# Altium PCB ROBOT_MOTHERBOARD.PcbDoc (part 2 of 3)
Units mm, origin at the board's own origin, x right, y up, seen from the top; angles counter-clockwise.
Board outline 122.81 x 59.7 mm, 4 copper layers (SIG1, GND, PWR, SIG2), stack 0.603 mm thick; 150 components, 74 nets, 540 pads, 464 vias.
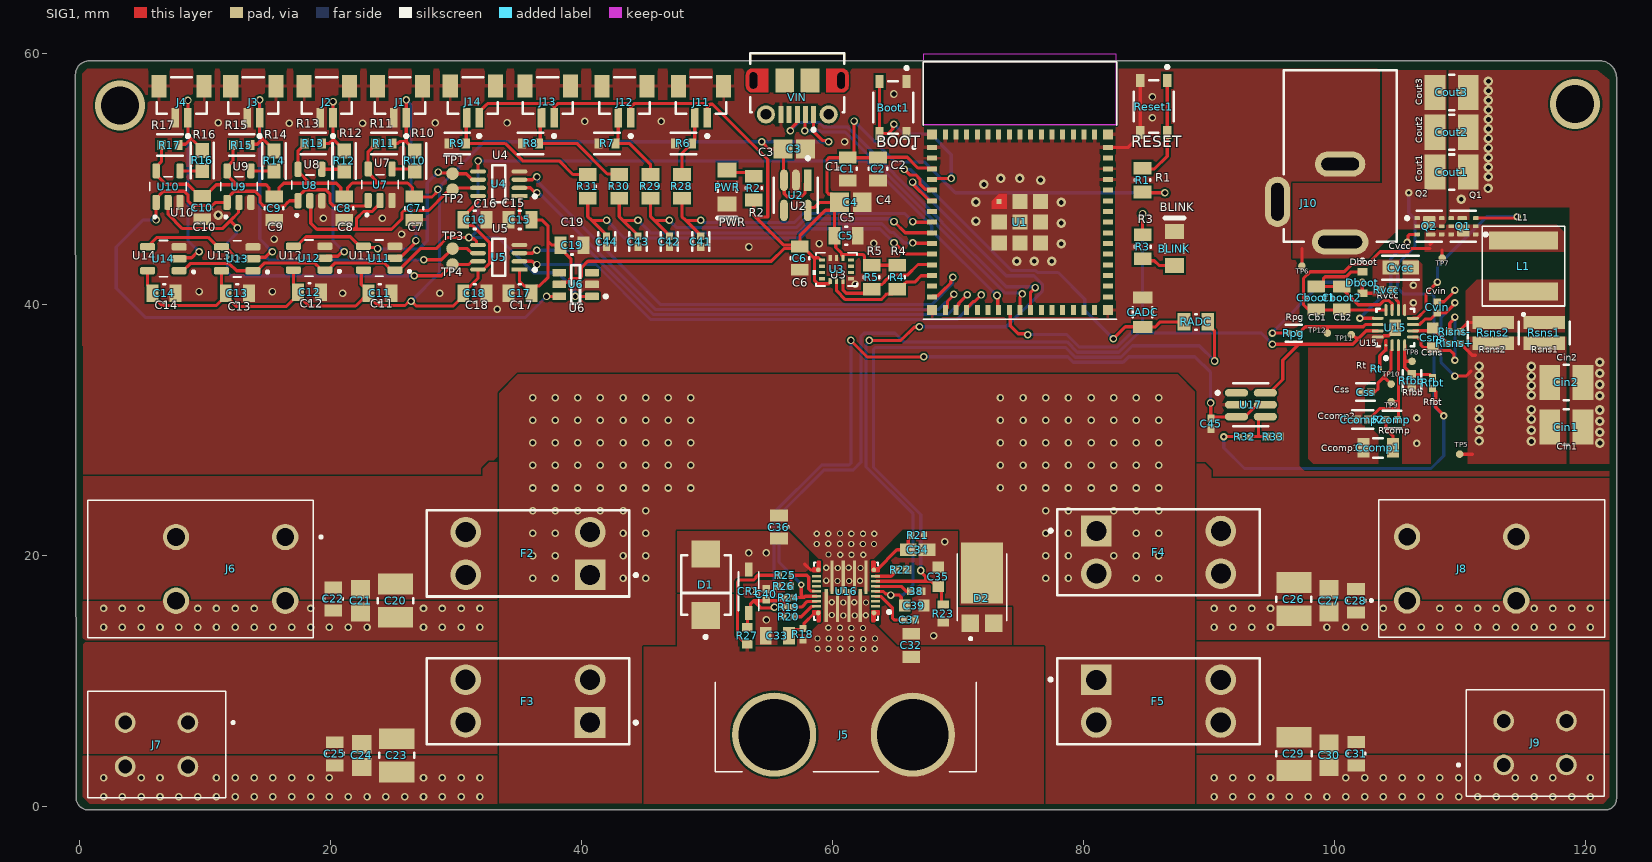
[diagram p0: SIG1 view]

## Part data (continued)
Rfbb: library part CMP-2002-08157-2, "RES Thick Film, 11kΩ, 1%, 0.063W, 100ppm/°C, 0402", Case Code (Imperial)=0402, Case Code (Metric)=1005, Max Operating Temperature=155°C, Max Power Dissipation=63mW, Min Operating Temperature=-55°C, Package Quantity=10, Resistance=11kR, Temperature Coefficient=100ppm/°C, Tolerance=1%, Voltage Rating=50V, Case/Package=0402, Composition="Thick Film", Contact Plating=Tin, Depth=0.5mm, Features="Automotive AEC-Q200", Height=0.35mm, Lead Free="Lead Free", Length=1mm, Military Standard=Not, Number of Pins=2, Number of Terminations=2, Packaging="Tape and Reel", Power Rating=63mW, Radiation Hardening=No, Termination=SMD/SMT, Voltage Rating (DC)=50V, Weight=2.3E-05oz, Width=0.02inch
Rfbt: library part CMP-2002-08212-1, Manufacturer="Vishay Dale", Part Number=CRCW0402150KFKED
Rsns1 Rsns2: library part CMP-2003-04764-2, "10 mOhms ±1% 1W Chip Resistor Wide 0612 (1632 Metric), Current Sense Thin Film", Case Code (Imperial)=1206, Case Code (Metric)=3216, Max Operating Temperature=125°C, Max Power Dissipation=1W, Min Operating Temperature=-55°C, Package Quantity=1000, Resistance=10mR, Resistor Type="Thin Film", Temperature Coefficient=200ppm/°C, Tolerance=1%, Case/Package=1206, Height=0.5mm, Lead Free="Lead Free", Length=3.2mm, Number of Terminations=2, Packaging="Cut Tape", Power Rating=1W, RoHS Compliant=Yes, Technology="THIN FILM", Termination=SMD/SMT, Weight=0.000466oz, Width=1.6mm
Rt: library part CMP-009-00177-1, "105 kOhms Â±1% 0.05W, 1/20W Chip Resistor 0201 (0603 Metric) Moisture Resistant Thick Film", Case/Package="SMD-2 Yageo", Check_prices=https://www.snapeda.com/parts/RC0201FR-07105KL/Yageo/view-part/?ref=eda, Component Type=Standard, Design Item ID=RC0201FR-07105KL, MF=Yageo, MP=RC0201FR-07105KL, Pins=2, SnapEDA_Link=https://www.snapeda.com/parts/RC0201FR-07105KL/Yageo/view-part/?ref=snap, Source=RC0201FR-07105KL.SchLib
Rvcc: library part CMP-2002-08486-1, Manufacturer="Vishay Dale", Part Number=CRCW04022R00FKED
U1: library part CMP-025-000000-2, Package=None, Component Type=Standard, Design Item ID=ESP32-S3-MINI-1-N8, MF="{'manufacturer': u'Espressif Systems'}", MP=ESP32-S3-MINI-1-N8, Pin Count=73, Price=None, Source=ESP32-S3-MINI-1-N8.SchLib
U2: library part CMP-12756-000035-1, "IC REG LINEAR 3.3V 600MA SOT25", Case/Package=SOT-23-5, Dropout Voltage=250mV, Max Input Voltage=6V, Max Operating Temperature=85°C, Max Output Current=600mA, Min Input Voltage=2.5V, Min Operating Temperature=-40°C, Output Voltage=3.3V, Package Quantity=1, Quiescent Current=55uA, Accuracy=1.5%, Height=1.3mm, Lead Free="Lead Free", Length=3.1mm, Mount="Surface Mount", Number of Outputs=1, Number of Pins=5, Number of Regulators=1, Output Current=600mA, Output Type=Fixed, Packaging="Tape and Reel", Polarity=Positive, Width=1.7mm
U3: "No Description Available", Manufacturer_Name="Bosch Sensortec", Copyright="Copyright (C) 2025 Ultra Librarian. All rights reserved.", Manufacturer_Part_Number=BMI323, RefDes=RefDes, Type=Type
U4 U5: library part CMP-0000-1, "2-Bit Dual Supply Transceiver with Configurable Voltage-Level Shifting and 3-State Outputs 8-SSOP -40 to 85", Ambient Temperature Range High=85°C, Case/Package=SSOP, High Level Output Current=-32mA, Low Level Output Current=32mA, Manufacturer Lifecycle Status=ACTIVE, Max Junction Temperature (Tj)=150°C, Max Supply Voltage=5.5V, Min Operating Temperature=-40°C, Min Supply Voltage=1.65V, Output Current=50mA, Quiescent Current=3µA, Contact Plating=Gold, Data Rate=420Mbps, Direction=Bidirectional, Height=1.3mm, Lead Free="Lead Free", Length=2.95mm, Lifecycle Status=Production, Logic Function="Transceiver, Translator", Max Operating Temperature=85°C, Number of Bits=2, Number of Channels=2, Number of Circuits=1, Number of Elements=1, Number of Inputs=1, Number of Outputs=1, Packaging="Cut Tape", Pins=8, Polarity=Non-Inverting, Propagation Delay=45.2ns, Radiation Hardening=No, REACH SVHC=No, RoHS=Compliant, Schedule B="8542390000, 8542390000", Thickness=1.29mm, Turn-On Delay Time=17.7ns, Weight=23.388357mg, Width=2.8mm
U6: library part CMP-04903-000086-1, "IC INVERTER 2CH 2-INP SOT23-6", Case/Package=SOT-23-6, High Level Output Current=-32mA, Low Level Output Current=32mA, Max Operating Temperature=125°C, Max Supply Voltage=5.5V, Min Operating Temperature=-40°C, Min Supply Voltage=1.65V, Operating Supply Voltage=5V, Package Quantity=3000, Quiescent Current=10uA, Lead Free="Lead Free", Logic Function=Inverter, Mount="Surface Mount", Number of Bits=2, Number of Circuits=2, Number of Elements=2, Number of Gates=2, Number of Inputs=2, Number of Pins=6, Packaging="Tape and Reel", Propagation Delay=3.7ns, Radiation Hardening=No, RoHS Compliant=Yes, Series=74LVC, Technology=CMOS, Turn-On Delay Time=8ns, Weight=0.000557oz
U7 U8 U9 U10 U11 U12 U13 U14: library part CMP-009-000000-3, "Single 4.5-V to 5.5-V buffer with TTL-compatible CMOS inputs and 3-state outputs", Package="SOT-23-5 Texas Instruments", Check_prices=https://www.snapeda.com/parts/SN74AHCT1G125DBVT/Texas+Instruments/view-part/?ref=eda, Component Type=Standard, Design Item ID=SN74AHCT1G125DBVT, MF="Texas Instruments", MP=SN74AHCT1G125DBVT, Pin Count=5, SnapEDA_Link=https://www.snapeda.com/parts/SN74AHCT1G125DBVT/Texas+Instruments/view-part/?ref=snap, Source=SN74AHCT1G125DBVT.SchLib
U15: library part CMP-04918-000522-1, "IC REG CTRLR BOOST 16WQFN", Max Frequency=1MHz, Max Operating Temperature=150°C, Min Operating Temperature=-40°C, Operating Supply Voltage=7.5V, Output Current=2A, Output Voltage=58V, Package Quantity=3000, Quiescent Current=600uA, Clock Sync=No, Contact Plating=Gold, Duty Cycle=95%, Lead Free="Lead Free", Max Duty Cycle=50%, Mount="Surface Mount", Number of Output Phases=1, Number of Outputs=1, Number of Pins=16, Output Configuration=Positive, Packaging="Tape and Reel", Radiation Hardening=No, RoHS Compliant=Yes, Switching Frequency=1MHz, Synchronous Rectifier=Yes, Topology=Boost
U16: library part CMP-027-000000-2, "4.5-V to 16-V, 0.59-mÎ©, 80-A stackable compact eFuse with accurate and fast current monitor 26-VQFN-HR -40 to 125", Manufacturer_Name="Texas Instruments", Copyright="Copyright (C) 2025 Ultra Librarian. All rights reserved.", Design Item ID=TPS259851RQPR, Manufacturer_Part_Number=TPS259851RQPR, RefDes=RefDes, Source=TPS259851RQPR.SchLib, Type=TYPE
U17: library part CMP-1708-00001-5, "IC COMP WINDOW W/REF 6SOT", Case/Package=SOT, Max Operating Temperature=125°C, Max Supply Voltage=18V, Min Operating Temperature=-40°C, Min Supply Voltage=1.8V, Nominal Supply Current=7uA, Number of Voltages Monitored=2, Operating Supply Current=5.5uA, Package Quantity=3000, Quiescent Current=11uA, Undervoltage Threshold=1.7V, Hysteresis=5.5mV, Lead Free="Lead Free", Mount="Surface Mount", Number of Channels=1, Number of Elements=2, Number of Pins=6, Packaging="Tape and Reel", Propagation Delay=29us, Radiation Hardening=No, REACH SVHC="No SVHC", Watchdog Timer=No
VIN: library part CMP-2000-05827-1, "Micro-USB B Receptacle, Right Angle, Bottom Mount, Surface Mount, with Solder Tabs, -30 to 85 degC, 5-Pin USB, RoHS, Tape and Reel", Manufacturer=Molex, Package Description="5-Leads USB, Micro B, Body 7.5 x 5 mm, Pitch 0.65 mm", Package Reference=MICRO-B, Package Version="Rev. F, 12/2012", Standard Package=1, Voltage - Max=30V, 3D Model=105017-0001.stp, Catalog Drawings=1050170001, Category=Connectors,Interconnects, Circuits=5, Connector Type=USB-microB, Datasheet URL=http://www.molex.com/elqNow/elqRedir.htm?ref=http://www.molex.com/webdocs/datasheets/pdf/en-us/1050170001_IO_CONNECTORS.pdf, Datasheet Version=03/2016, Family=USB,DVI,HDMIConnectors, Featured Product=Micro-USBConnectorsUSBConnectors, Features=Shielded,SolderRetention, Gender=Receptacle, Ingress Protection=-, Manufacturer URL=http://www.molex.com/, Mating Products=WM17145-ND-CABLEMICROUSBBTOSTDA1.0MWM17147-ND-CABLEMICROUSBBTOSTDA2.0MWM17146-ND-CABLEMICROUSBBTOSTDA1.5M, Mounting Technology=SurfaceMount, Mounting Type=BoardCutout,SurfaceMount,RightAngle, Number of Contacts=5, Online Catalog=Molex-MicroUSB, Other Names=WM1399DKR, Package URL=http://www.molex.com/pdm_docs/sd/1050170001_sd.pdf, Packaging=Digi-Reel®, PCN Assembly/Origin=ResinSupplier21/Oct/2015, RoHS Information=1050170001CertofCompliance, Series=-, Specifications=-

## Free pads (board coordinates)
  round 1 smd: 2(29.718,43.18) 2(29.718,44.45) 2(29.718,49.149) 2(29.718,50.419)
  round 0.6 smd mask+0: 2(97.409,43.053) 2(108.585,43.688) 2(109.982,28.067) ""(99.441,37.719) ""(101.346,37.592) ""(104.521,32.258) ""(104.521,33.655) ""(106.187,35.469)

## Via types
v1: diameter 0.6, hole 0.35, SIG1 to SIG2, 251 vias
v2: diameter 0.6, hole 0.381, SIG1 to SIG2, 93 vias
v3: diameter 0.762, hole 0.381, SIG1 to SIG2, 50 vias
v4: diameter 0.5, hole 0.3, SIG1 to SIG2, 50 vias
v5: diameter 0.6, hole 0.3, SIG1 to SIG2, 18 vias
v6: diameter 4, hole 3.048, SIG1 to SIG2, 2 vias

## Nets (pads, with @x,y where several pads share a name; then routed paths per layer and width w, separated by ;. In a path a pad name is that pad's centre, name@x,y a point inside that pad or via, vN(x,y) a via of type N, cw(c..) or ccw(c..) an arc to the next point about the centre after c; other vN are vias at no path point)
3V3: C1.1 C2.1 C4.2 C5.1 C6.2 C15.1 C17.1 C19.1 J11.1 J12.1 J13.1 J14.1 R1.1 R2.1 R4.1 R5.1 U1.3 U2.5 U3.5 U3.8 U3.12 U4.1 U5.1 U6.5 | length 146.2
  SIG1 w0.254: J14.1@31.839,54.879 31.839,55.354 32.365,55.88 32.377,55.88 32.504,56.007 37.584,56.007 37.838,55.753 ; U5.1@35.051,42.784 35.051,41.856 35.44,41.467 35.665,41.467 C17.1@36.013,41.119 ; U4.1@35.052,48.641 35.052,47.053 35.306,46.8 35.949,46.8 C15.1@36.013,46.736 36.83,46.736 37.338,46.228 37.338,45.009 ; C17.1@36.013,40.894 C17.1@36.013,41.119 ; J13.1@37.808,54.879 37.838,54.909 37.838,55.753 ; U6.5@38.227,41.59 38.4,41.763 38.779,41.763 38.799,41.783 38.862,41.783 39.151,42.072 ; J12.1@43.926,54.867 43.926,55.761 ; J11.1@50.022,54.867 50.03,54.875 50.03,55.753 ; R2.1@53.721,48.325 53.721,47.117 53.879,46.959 ; C6.2@57.404,44.788 57.404,45.466 59.436,47.498 C4.2@60.162,47.498 ; U2.5@58.034,47.498 58.034,47.562 58.201,47.73 58.574,47.73 58.978,48.133 C4.2@60.568,48.133 ; U3.8@59.055,43.549 58.88,43.724 58.572,43.724 ; U3.12@59.825,41.77 59.7,41.645 58.813,41.645 58.572,41.886 58.572,43.724 ; U3.5@60.825,43.713 U3.5@60.825,43.828 ; C1.1@61.214,51.725 61.374,51.725 61.722,52.073 v2(61.722,54.61) ; C2.1@63.627,51.689 59.712,51.689 59.563,51.54 59.563,48.93 59.712,48.781 59.945,48.781 60.568,48.158 C4.2@60.568,48.133 ; C2.1@63.627,51.725 65.956,51.725 66.807,50.874 U1.3@68.194,50.874 ; R4.1@65.151,43.115 R5.1@63.119,43.115 62.918,43.115 62.542,43.491 62.542,43.868 62.437,43.973 60.825,43.973 U3.5@60.825,43.828 ; R1.1@84.709,48.96 84.774,48.895 v2(86.487,48.895) ; C17.1@36.013,41.119 36.361,41.467 36.641,41.467 37.338,42.164 37.338,45.009 ; 37.338,45.009 37.611,44.736 38.286,44.736 C19.1@38.318,44.704 38.318,44.479 39.151,43.646 39.151,42.072 ; 37.838,55.753 38.092,56.007 43.68,56.007 43.926,55.761 ; 39.151,42.072 39.851,42.072 40,42.221 40,42.925 40.509,43.434 55.118,43.434 56.134,44.45 57.241,44.45 C6.2@57.404,44.613 ; 43.926,55.761 43.942,55.761 44.188,56.007 49.776,56.007 50.03,55.753 ; 50.03,55.753 50.226,55.949 50.436,55.949 54.833,51.551 54.833,46.959 53.879,46.959 ; 53.879,46.959 56.091,44.747 57.27,44.747 C6.2@57.404,44.613 ; C6.2@57.404,44.613 57.629,44.613 58.518,43.724 58.572,43.724 ; C4.2@60.162,47.498 60.568,47.498 C4.2@60.568,48.133 ; C4.2@60.162,47.498 C5.1@60.162,45.466 60.265,45.363 60.265,44.534 60.729,44.069 60.729,43.924 U3.5@60.825,43.828 ; C4.2@60.162,47.498 60.162,47.727 C4.2@60.568,48.133
  SIG2 w0.254: v2(61.722,54.61) 64.992,51.34 67.351,51.34 69.796,48.895 v2(86.487,48.895)
4V7: C40.1 C45.1 CR1.1 R19.1 R20.2 R24.1 R27.2 U17.3 U17.5 | length 71.9
  SIG1 w0.254: R27.2@53.221,14.273 CR1.1@53.221,15.575 ; CR1.1@53.321,15.42 53.321,15.575 53.474,15.727 53.474,16.154 53.71,16.391 ; v2(55.372,15.875) 55.311,15.814 54.287,15.814 53.71,16.391 ; R20.2@56.094,15.113 56.107,15.126 56.107,15.862 R19.1@56.12,15.875 R24.1@56.12,16.637 56.076,16.637 55.83,16.391 54.718,16.391 53.71,16.391 ; v2(61.468,37.129) 62.783,35.814 v2@67.271,35.814 ; v2(90.128,32.153) 90.149,32.132 90.149,31.001 90.17,30.98 90.207,31.017 92.158,31.017 U17.3@92.195,31.054 92.87,31.054 93.82,32.004 U17.5@94.495,32.004
  SIG2 w0.254: v2(55.372,15.875) 55.33,15.917 55.33,23.39 59.142,27.201 61.319,27.201 61.468,27.35 v2@61.468,37.084 ; v2(67.268,35.836) 78.733,35.836 79.183,35.387 83.162,35.387 83.612,35.836 88.878,35.836 90.128,34.586 v2(90.128,32.153)
5V-RX1: pad.2@29.718,50.419 U4.6 U11.4 U12.4 | length 20.9
  SIG1 w0.254: U12.4@17.033,44.638 17.332,44.638 17.498,44.804 17.498,44.848 17.624,44.973 18.039,45.388 21.561,45.388 22.311,44.638 U11.4@22.621,44.638 22.715,44.544 23.655,44.544 v2(23.749,44.45) ; v2(28.575,50.546) 28.639,50.482 29.654,50.482 pad.2@29.718,50.419 30.814,50.419 31.292,49.941 U4.6@31.751,49.941
  SIG2 w0.254: v2(23.749,44.45) 23.772,44.427 27.07,44.427 27.71,45.068 27.71,49.681 v2(28.575,50.546)
5V-RX2: pad.2@29.718,44.45 U5.6 U13.4 U14.4 | length 27.9
  SIG1 w0.254: U14.4@5.418,44.592 6.165,45.339 10.239,45.339 10.993,44.585 U13.4@11.303,44.585 11.602,44.585 12.446,43.741 v2(12.446,43.688) ; v2(27.432,43.561) 28.829,43.561 pad.2@29.718,44.45 30.903,44.45 31.269,44.084 U5.6@31.75,44.084
  SIG2 w0.254: v2(12.446,43.688) 14.944,43.688 15.094,43.538 27.409,43.538 v2(27.432,43.561)
5V-TX1: pad.2@29.718,49.149 U4.7 U7.2 U8.2 | length 20.6
  SIG1 w0.254: U8.2@18.354,48.26 18.426,48.188 18.426,46.471 18.913,45.984 21.897,45.984 ; U7.2@23.942,48.29 23.942,47.991 23.776,47.825 23.725,47.825 23.564,47.663 23.564,47.657 23.315,47.408 22.624,47.408 22.059,46.843 22.059,46.146 21.897,45.984 ; U4.7@31.751,49.291 31.736,49.275 29.844,49.275 pad.2@29.718,49.149 29.516,49.149 29.271,48.904 29.225,48.904 27.809,47.488 25.855,47.488 25.693,47.326 25.693,46.824 24.853,45.984 21.897,45.984
5V-TX2: pad.2@29.718,43.18 U5.7 U9.2 U10.2 | length 33.6
  SIG1 w0.254: U10.2@7.051,48.133 7.051,47.178 8.19,46.039 11.368,46.039 12.013,46.684 ; v2(12.573,46.101) 12.013,46.661 12.013,46.684 ; U9.2@12.7,48.133 12.659,48.092 12.659,47.33 12.013,46.684 ; v2(26.67,42.291) 28.829,42.291 pad.2@29.718,43.18 31.015,43.18 31.269,43.434 U5.7@31.75,43.434
  SIG2 w0.254: v2(12.573,46.101) 12.479,46.007 12.479,45.626 11.788,44.935 11.788,42.568 12.065,42.291 v2(26.67,42.291)